# EAGLE board otherplan457_Programmer_Shield (EAGLE 6.5.0)
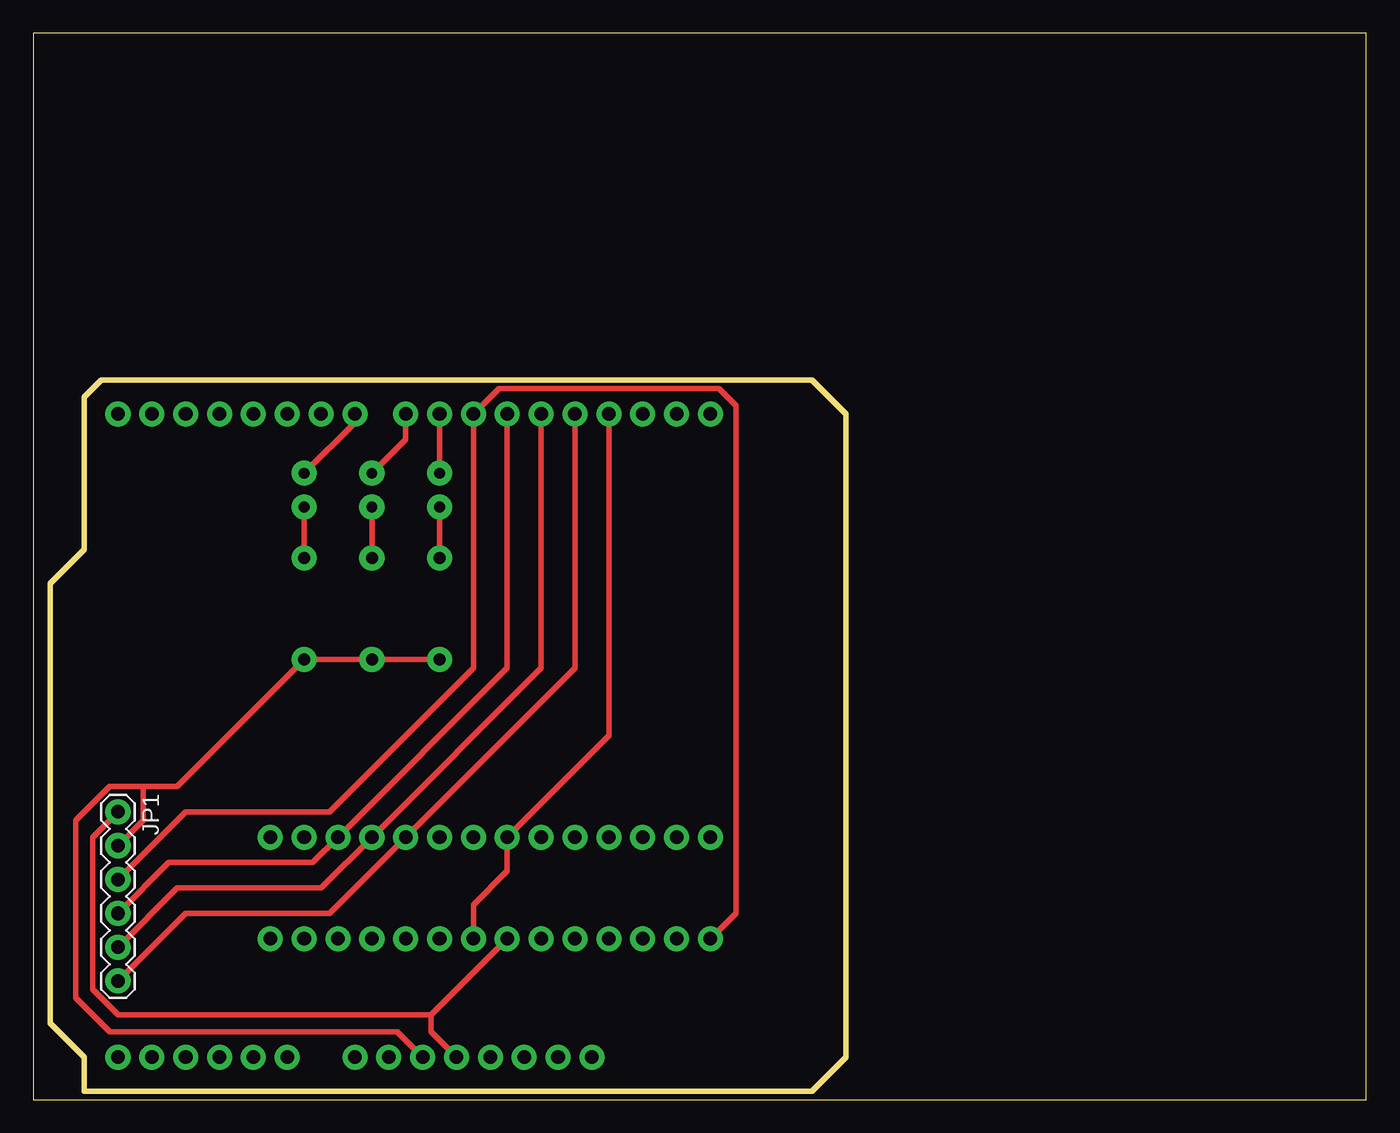
[diagram p0: board, top side]
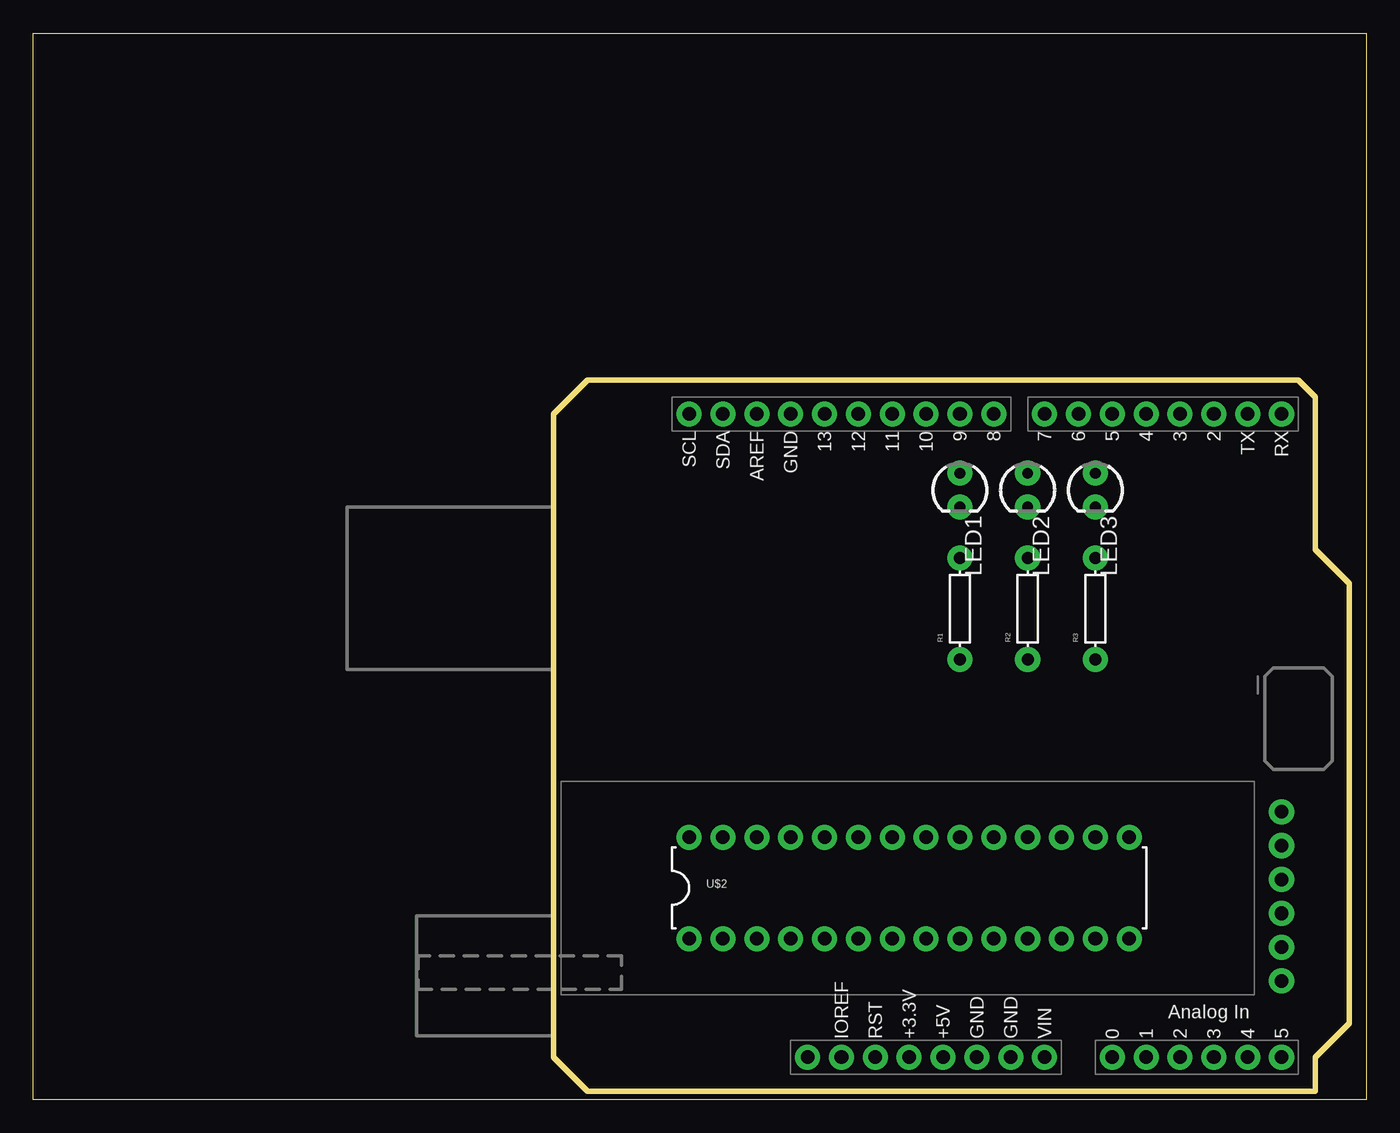
[diagram p1: board, bottom side, seen from below]

Size 100 x 80 mm. Coordinates in mm from the lower left corner, seen from the top.
Outline: 0,0 100,0 100,80 0,80 0,0
Outline: 5.08,53.98 3.81,52.7 3.81,41.27 1.27,38.73 1.27,5.71 3.81,3.17 3.81,0.64 58.42,0.64 60.96,3.17 60.96,51.44 58.42,53.98 5.08,53.98
Copper layers (1*16): Top 0.035mm / dielectric 1.5mm / Bottom 0.035mm
Design rules "default": minimum track width 10mil, minimum drill 24mil, track to track 8mil, track to pad 8mil, pad to pad 8mil, via to via 8mil, smd to smd 8mil, copper to edge 40mil, drill to drill 8mil, minimum pad ring 10mil, minimum via ring 8mil, stop-mask expansion 4mil, vias tented up to drill 0mil, thermal gap 10mil

## Footprints (pad centres in the part's own frame; a part is rotated, then mirrored left to right if it is on the bottom)
1X06 = drill 1.016 pad 1.88: 1 0,0; 2 2.54,0; 3 5.08,0; 4 7.62,0; 5 10.16,0; 6 12.7,0
LED3MM = drill 0.813 pad 1.88: A -1.27,0; K 1.27,0
AXIAL-0.3 = drill 0.9 pad 1.88: P$1 -3.81,0; P$2 3.81,0
UNO_R3_SHIELD = drill 1.016 pad 1.88: 3.3V 24.13,5.08; 5V 24.13,7.62; A0 24.13,20.32; A1 24.13,22.86; A2 24.13,25.4; A3 24.13,27.94; A4 24.13,30.48; A5 24.13,33.02; AREF -24.13,-6.35; D2 -24.13,27.94; D3 -24.13,25.4; D4 -24.13,22.86; D5 -24.13,20.32; D6 -24.13,17.78; D7 -24.13,15.24; D8 -24.13,11.43; D9 -24.13,8.89; D10 -24.13,6.35; D11 -24.13,3.81; D12 -24.13,1.27; D13 -24.13,-1.27; GND@0 24.13,10.16; GND@1 24.13,12.7; GND@2 -24.13,-3.81; IOREF 24.13,0; NC 24.13,-2.54; RES 24.13,2.54; RX -24.13,33.02; SCL -24.13,-11.43; SDA -24.13,-8.89; TX -24.13,30.48; VIN 24.13,15.24
DIL28-3-ZIF_SOCKET = drill 1.016 pad 1.88: 1 -16.51,-3.81; 2 -13.97,-3.81; 3 -11.43,-3.81; 4 -8.89,-3.81; 5 -6.35,-3.81; 6 -3.81,-3.81; 7 -1.27,-3.81; 8 1.27,-3.81; 9 3.81,-3.81; 10 6.35,-3.81; 11 8.89,-3.81; 12 11.43,-3.81; 13 13.97,-3.81; 14 16.51,-3.81; 15 16.51,3.81; 16 13.97,3.81; 17 11.43,3.81; 18 8.89,3.81; 19 6.35,3.81; 20 3.81,3.81; 21 1.27,3.81; 22 -1.27,3.81; 23 -3.81,3.81; 24 -6.35,3.81; 25 -8.89,3.81; 26 -11.43,3.81; 27 -13.97,3.81; 28 -16.51,3.81

## Placement (x,y rotation side)
JP1  [1X06]  6.35,21.59 270 top
LED1  [LED3MM]  30.48,45.72 270 bottom
LED2  [LED3MM]  25.4,45.72 270 bottom
LED3  [LED3MM]  20.32,45.72 270 bottom
R1  [AXIAL-0.3]  30.48,36.83 90 bottom
R2  [AXIAL-0.3]  25.4,36.83 90 bottom
R3  [AXIAL-0.3]  20.32,36.83 90 bottom
U$1  ARDUINO_R3_SHIELD  [UNO_R3_SHIELD]  39.37,27.3 270 bottom
U$2  ZIFSOCKET-28-3ZIFFSOCKET-28-3  [DIL28-3-ZIF_SOCKET]  34.29,15.88 0 bottom

## Library data of the parts
JP1 U$2 = SparkFun-Connectors
LED1-LED3 = SparkFun-LED
R1-R3 = SparkFun-Resistors
U$1 = SparkFun-Boards

## Nets
N$1: LED1.A U$1.D9
N$2: LED2.A U$1.D8
N$3: LED3.A U$1.D7
N$4: LED1.K R1.P$2
N$5: LED2.K R2.P$2
N$6: LED3.K R3.P$2
N$7: JP1.3 U$1.D10 U$2.1
N$8: JP1.4 U$1.D11 U$2.17
N$9: JP1.5 U$1.D12 U$2.18
N$10: JP1.6 U$1.D13 U$2.19
N$11: JP1.1 U$1.5V U$2.7
N$13: JP1.2 R1.P$1 R2.P$1 R3.P$1 U$1.GND@0
N$14: U$1.GND@2 U$2.8 U$2.22

## Tracks (layer width: path | path; a pad name or v marks a point on that pad's centre or on a via)
N$1
  Top 0.406: U$1.D9 LED1.A
N$2
  Top 0.406: LED2.A 27.94,49.53 U$1.D8
N$3
  Top 0.406: LED3.A 24.13,50.8 U$1.D7
N$4
  Top 0.406: R1.P$2 LED1.K
N$5
  Top 0.406: LED2.K R2.P$2
N$6
  Top 0.406: R3.P$2 LED3.K
N$7
  Top 0.406: JP1.3 11.43,21.59 22.23,21.59 33.02,32.38 U$1.D10 34.92,53.34 51.44,53.34 52.7,52.07 52.7,13.97 U$2.1
N$8
  Top 0.406: JP1.4 10.16,17.78 20.95,17.78 U$2.17 35.56,32.38 U$1.D11
N$9
  Top 0.406: JP1.5 10.79,15.88 21.59,15.88 U$2.18 38.1,32.38 U$1.D12
N$10
  Top 0.406: U$1.D13 40.64,32.38 U$2.19 22.23,13.97 11.43,13.97 JP1.6
N$11
  Top 0.406: JP1.1 4.45,19.68 4.45,8.26 6.35,6.35 29.84,6.35 | U$2.7 29.84,6.35 | U$1.5V 29.84,5.08 29.84,6.35
N$13
  Top 0.406: R1.P$1 R2.P$1 R3.P$1 10.79,23.5 8.26,23.5 | U$1.GND@0 27.3,5.08 5.71,5.08 3.17,7.62 3.17,20.95 5.71,23.5 8.26,23.5 | JP1.2 8.26,20.95 8.26,23.5
N$14
  Top 0.406: U$2.8 33.02,14.61 35.56,17.14 U$2.22 43.18,27.3 U$1.GND@2